# Altium PCB ESP_Watch_PCB.PcbDoc (part 2 of 2)
Units mm, origin at the board's own origin, x right, y up, seen from the top; angles counter-clockwise.
Board outline 29.7 x 35.5 mm, 4 copper layers (TOP, LY2 - GND, LY3 - GND, BOTTOM), stack 0.771 mm thick; 81 components, 71 nets, 299 pads, 0 vias.
Unrouted connection lines stored in the file: 101.
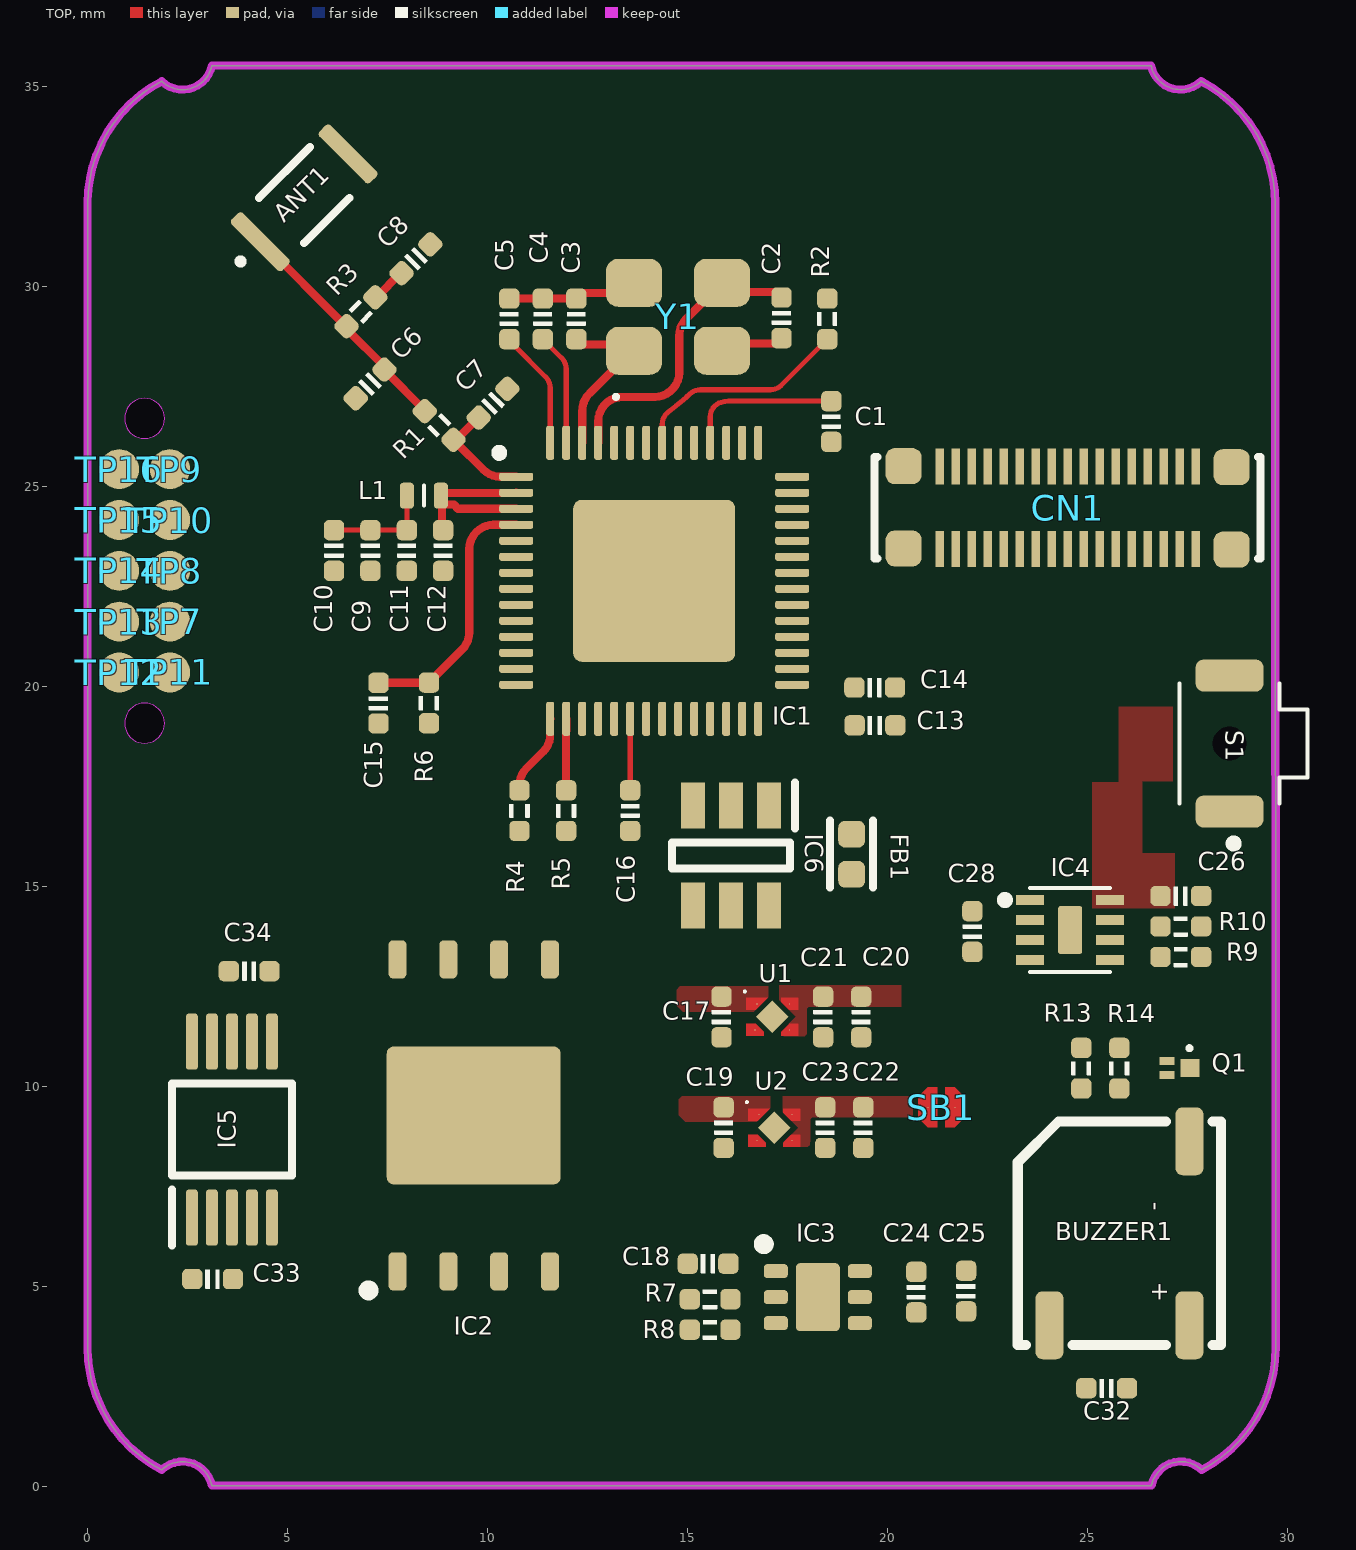
[diagram p0: TOP view]

## Silkscreen, mask and mechanical layers (free items; w line width, h text height) (continued)
Top Assembly: (continued)
  text "DIMENSIONS ARE IN INCHES" at 58.891,-47.611 h0.64
  text "TOLERANCES:" at 58.891,-48.398 h0.64
  text "ANGLES +/-1 DEG" at 65.394,-48.398 h0.64
  text "CHECKED" at 86.247,-48.983 h0.64
  text "2 PL DECIMALS +/- .02" at 58.891,-49.186 h0.64
  text "3 PL DECIMALS +/- .005" at 58.891,-49.973 h0.64
  text "ASSEMBLY DRAWING,PCB," at 108.32,-50.481 h1.6
  text "REMOVE ALL BURRS AND SHARP EDGES" at 58.891,-51.548 h0.64
  text "RELEASED" at 86.247,-51.751 h0.64
  text "CONCENTRICITY MACHINED DIAMETERS .010 FIM" at 58.891,-52.335 h0.64
  text "'.TBTitle'" at 108.32,-53.097 h1.6
  text "DIMENSIONAL LIMITS APPLY AFTER PROCESSES" at 58.891,-53.148 h0.64
  text "HOLE DIAMETER TOLERANCE" at 64.022,-55.307 h0.64
  text ".013" at 61.228,-56.679 h0.64
  text ".126" at 68.721,-56.679 h0.64
  text ".251" at 77.205,-56.679 h0.64
  text "+.005" at 63.743,-56.882 h0.64
  text "+.005" at 71.236,-56.882 h0.64
  text "+.006" at 79.719,-57.085 h0.64
  text "XXXXXX" at 38.876,-57.466 h0.64
  text "THRU" at 61.025,-57.466 h0.64
  text "THRU" at 68.721,-57.466 h0.64
  text "THRU" at 77.205,-57.466 h0.64
  text "REV" at 149.874,-57.466 h0.76
  text "SIZE" at 107.634,-57.669 h0.76
  text "DWG NO" at 110.783,-57.669 h0.76
  text "-.001" at 63.743,-57.873 h0.64
  text "-.001" at 71.236,-57.873 h0.64
  text "-.001" at 79.719,-57.873 h0.64
  text ".125" at 61.228,-58.279 h0.64
  text ".250" at 68.721,-58.279 h0.64
  text ".500" at 77.205,-58.279 h0.64
  text "'.TBBoardNumber'-DWG" at 117.692,-58.863 h1.6
  text "A" at 108.421,-59.244 h0.76
  text "NEXT ASSY" at 39.105,-59.422 h0.64
  text "USED ON" at 50.484,-59.422 h0.64
  text "'.TBRevision'" at 149.29,-59.422 h1.6
  text ".501" at 61.228,-59.854 h0.64
  text ".751" at 68.721,-59.854 h0.64
  text "1.001" at 76.747,-59.854 h0.64
  text "+.008" at 63.743,-60.032 h0.64
  text "+.010" at 71.236,-60.032 h0.64
  text "+.012" at 79.719,-60.032 h0.64
  text "THRU" at 61.025,-60.641 h0.64
  text "THRU" at 68.721,-60.641 h0.64
  text "THRU" at 77.205,-60.641 h0.64
  text "SCALE" at 107.634,-60.844 h0.76
  text "CUST:" at 115.33,-60.844 h0.76
  text "SHEET" at 139.206,-60.844 h0.76
  text "-.001" at 63.743,-61.022 h0.64
  text "-.001" at 71.236,-61.022 h0.64
  text "-.001" at 79.719,-61.022 h0.64
  text "APPLICATION" at 44.413,-61.225 h0.64
  text "1:1" at 110.783,-61.225 h0.76
  text "1 OF 2" at 143.93,-61.225 h0.76
  text ".750" at 61.152,-61.429 h0.64
  text "1.000" at 68.264,-61.429 h0.64
  text "2.000" at 76.747,-61.429 h0.64
  text "1" at 129.808,-64.705 h1.27
  text "6" at -38.823,-64.781 h1.27
  text "5" at -5.295,-64.781 h1.27
  text "4" at 27.09,-64.781 h1.27
  text "3" at 61.609,-64.781 h1.27
  text "2" at 94.375,-64.781 h1.27
Bottom Assembly (Mech4):
  lines w0.025: -64.934,-20.585 -61.759,-20.585 ; -64.934,20.867 -61.759,20.867 ; -64.934,62.32 -61.759,62.32 ; -21.271,-65.162 -21.271,-62.013 ; -21.271,103.544 -21.271,106.719 ; 12.663,-65.162 12.663,-62.013 ; 12.663,103.748 12.663,106.923 ; 45.81,-65.162 45.81,-62.013 ; 45.81,103.748 45.81,106.923 ; 79.77,-65.162 79.77,-62.013 ; 79.77,103.748 79.77,106.923 ; 112.917,-65.162 112.917,-62.013 ; 112.917,103.748 112.917,106.923 ; 152.744,-20.585 155.894,-20.585 ; 152.744,20.867 155.894,20.867 ; 152.744,62.32 155.894,62.32 ; -61.759,-61.911 152.617,-61.911 152.617,103.748 -61.759,103.748 -61.759,-61.911
  lines w0.152: -61.759,-60.032 -16.369,-60.032 ; -61.759,-56.501 -16.369,-56.501 ; -61.759,-47.814 -16.369,-47.814 ; -61.759,-42.277 -16.293,-42.277 -16.293,-62.013 ; -57.822,-60.032 -57.822,-56.501 ; -47.56,-62.013 -47.56,-60.032 ; -24.268,-62.013 -24.268,-60.032 ; -19.544,-60.032 -19.544,-56.501 ; 50.712,-62.013 52.287,-62.013
  lines w0.406: -65.721,100.598 -65.721,107.71 -58.609,107.71 ; -65.62,-59.168 -65.62,-66.28 -58.508,-66.28 ; 149.569,-65.975 156.681,-65.975 156.681,-58.863 ; 149.569,107.71 156.681,107.71 156.681,100.598
  lines w0.432: -61.759,-61.911 152.617,-61.911 152.617,103.748 -61.759,103.748 -61.759,-61.911
  text "1" at -36.664,104.154 h1.27
  text "2" at -4.888,104.154 h1.27
  text "3" at 29.249,104.154 h1.27
  text "4" at 63.768,104.154 h1.27
  text "5" at 96.153,104.154 h1.27
  text "6" at 129.681,104.154 h1.27
  text "D" at -62.368,76.316 h1.27
  text "D" at 155.31,76.316 h1.27
  text "C" at -62.165,35.066 h1.27
  text "C" at 155.487,35.066 h1.27
  text "ASSEMBLY BOTTOM SIDE" at 67.177,-1.101 h3.17
  text "B" at -62.165,-3.009 h1.27
  text "B" at 155.487,-3.009 h1.27
  text "A" at -61.962,-43.852 h1.27
  text "A" at 155.691,-43.852 h1.27
  text "SHM" at -19.061,-46.138 h1.6
  text "ASSEMBLY DRAWING,PCB," at -17.461,-50.481 h1.6
  text "'.TBTitle'" at -17.461,-53.097 h1.6
  text "REV" at -59.016,-57.466 h0.76
  text "DWG NO" at -19.925,-57.669 h0.76
  text "SIZE" at -16.775,-57.669 h0.76
  text "'.TBBoardNumber'-DWG" at -26.834,-58.863 h1.6
  text "A" at -17.563,-59.244 h0.76
  text "'.TBRevision'" at -58.088,-59.574 h1.6
  text "SHEET" at -48.348,-60.844 h0.76
  text "CUST:" at -24.472,-60.844 h0.76
  text "SCALE" at -16.775,-60.844 h0.76
  text "2 OF 2" at -53.072,-61.225 h0.76
  text "1:1" at -19.925,-61.225 h0.76
  text "1" at -38.95,-64.705 h1.27
  text "2" at -3.517,-64.781 h1.27
  text "3" at 29.249,-64.781 h1.27
  text "4" at 63.768,-64.781 h1.27
  text "5" at 96.153,-64.781 h1.27
  text "6" at 129.681,-64.781 h1.27
Fab Notes:
  drawing of 3364 lines, arcs and shapes, not listed
Drill Drawing:
  lines w0.254: -23.972,120.462 -22.57,120.462 -22.57,121.864 -23.972,121.864 -23.972,120.462
  lines w0.381: -25.243,119.516 97.769,119.516 ; -25.243,122.67 97.769,122.67 ; -17.136,116.362 -17.136,125.824 ; -10.974,116.362 -10.974,125.824 ; 2.94,116.362 2.94,125.824 ; 9.226,116.362 9.226,125.824 ; 18.377,116.362 18.377,125.824 ; 30.895,116.362 30.895,125.824 ; 38.394,116.362 38.394,125.824 ; 48.189,116.362 48.189,125.824 ; 56.798,116.362 56.798,125.824 ; 66.636,116.362 66.636,125.824 ; 81.935,116.362 81.935,125.824 ; -25.243,116.362 97.769,116.362 97.769,125.824 -25.243,125.824 -25.243,116.362
  text "Symbol" at -23.35,123.616 h1.83
  text "Count" at -16.19,123.616 h1.83
  text "Hole Size" at -10.028,123.616 h1.83
  text "Plated" at 3.886,123.616 h1.83
  text "Hole Type" at 10.172,123.616 h1.83
  text "Drill Layer Pair" at 19.324,123.616 h1.83
  text "Via/Pad" at 31.841,123.616 h1.83
  text "Pad Shape" at 39.34,123.616 h1.83
  text "Template" at 49.136,123.616 h1.83
  text "Description" at 57.744,123.616 h1.83
  text "Hole Tolerance (+)" at 67.582,123.616 h1.83
  text "Hole Tolerance (-)" at 82.881,123.616 h1.83
  text "1" at -16.19,120.462 h1.52
  text "0.850mm (33.47mil)" at -10.028,120.462 h1.52
  text "NPTH" at 3.886,120.462 h1.52
  text "Round" at 10.172,120.462 h1.52
  text "TOP - BOTTOM" at 19.324,120.462 h1.52
  text "Pad" at 31.841,120.462 h1.52
  text "Rounded" at 39.34,120.462 h1.52
  text "c42hn85" at 49.136,120.462 h1.52
  text "1 Total" at -16.19,117.308 h1.52

## Dimensions
3.106,35.515 to 3.142,0.016 on Dimensions
0,32.066 to 29.692,32.067 on Dimensions

## Text inside footprints (layer, text, board x,y; h text height)
BUZZER1: Top Overlay "-" at 26.994,6.883 h0.76 r90; Top Overlay "+" at 27.144,4.597 h0.76 r90
SB1: Top Assembly "No Assembly Req'd" at 20.739,9.438 h0.2; Top Assembly "Solderbridge" at 20.888,9.116 h0.2
TP3: Bottom Assembly (Mech4) "Test point. DNP." at 10.572,29.937 h0.25 r270
TP4: Bottom Assembly (Mech4) "Test point. DNP." at 13.111,29.937 h0.25 r270
TP5: Bottom Assembly (Mech4) "Test point. DNP." at 15.651,29.937 h0.25 r270
TP6: Bottom Assembly (Mech4) "Test point. DNP." at 18.191,29.937 h0.25 r270